# Altium PCB 1_ir-tara-f.PcbDoc (part 6 of 8)
Units mm, origin at the board's own origin, x right, y up, seen from the top; angles counter-clockwise.
Board outline 151 x 86.38 mm, 2 copper layers (Top Layer, Bottom Layer); 728 components, 20 nets, 2100 pads, 0 vias.
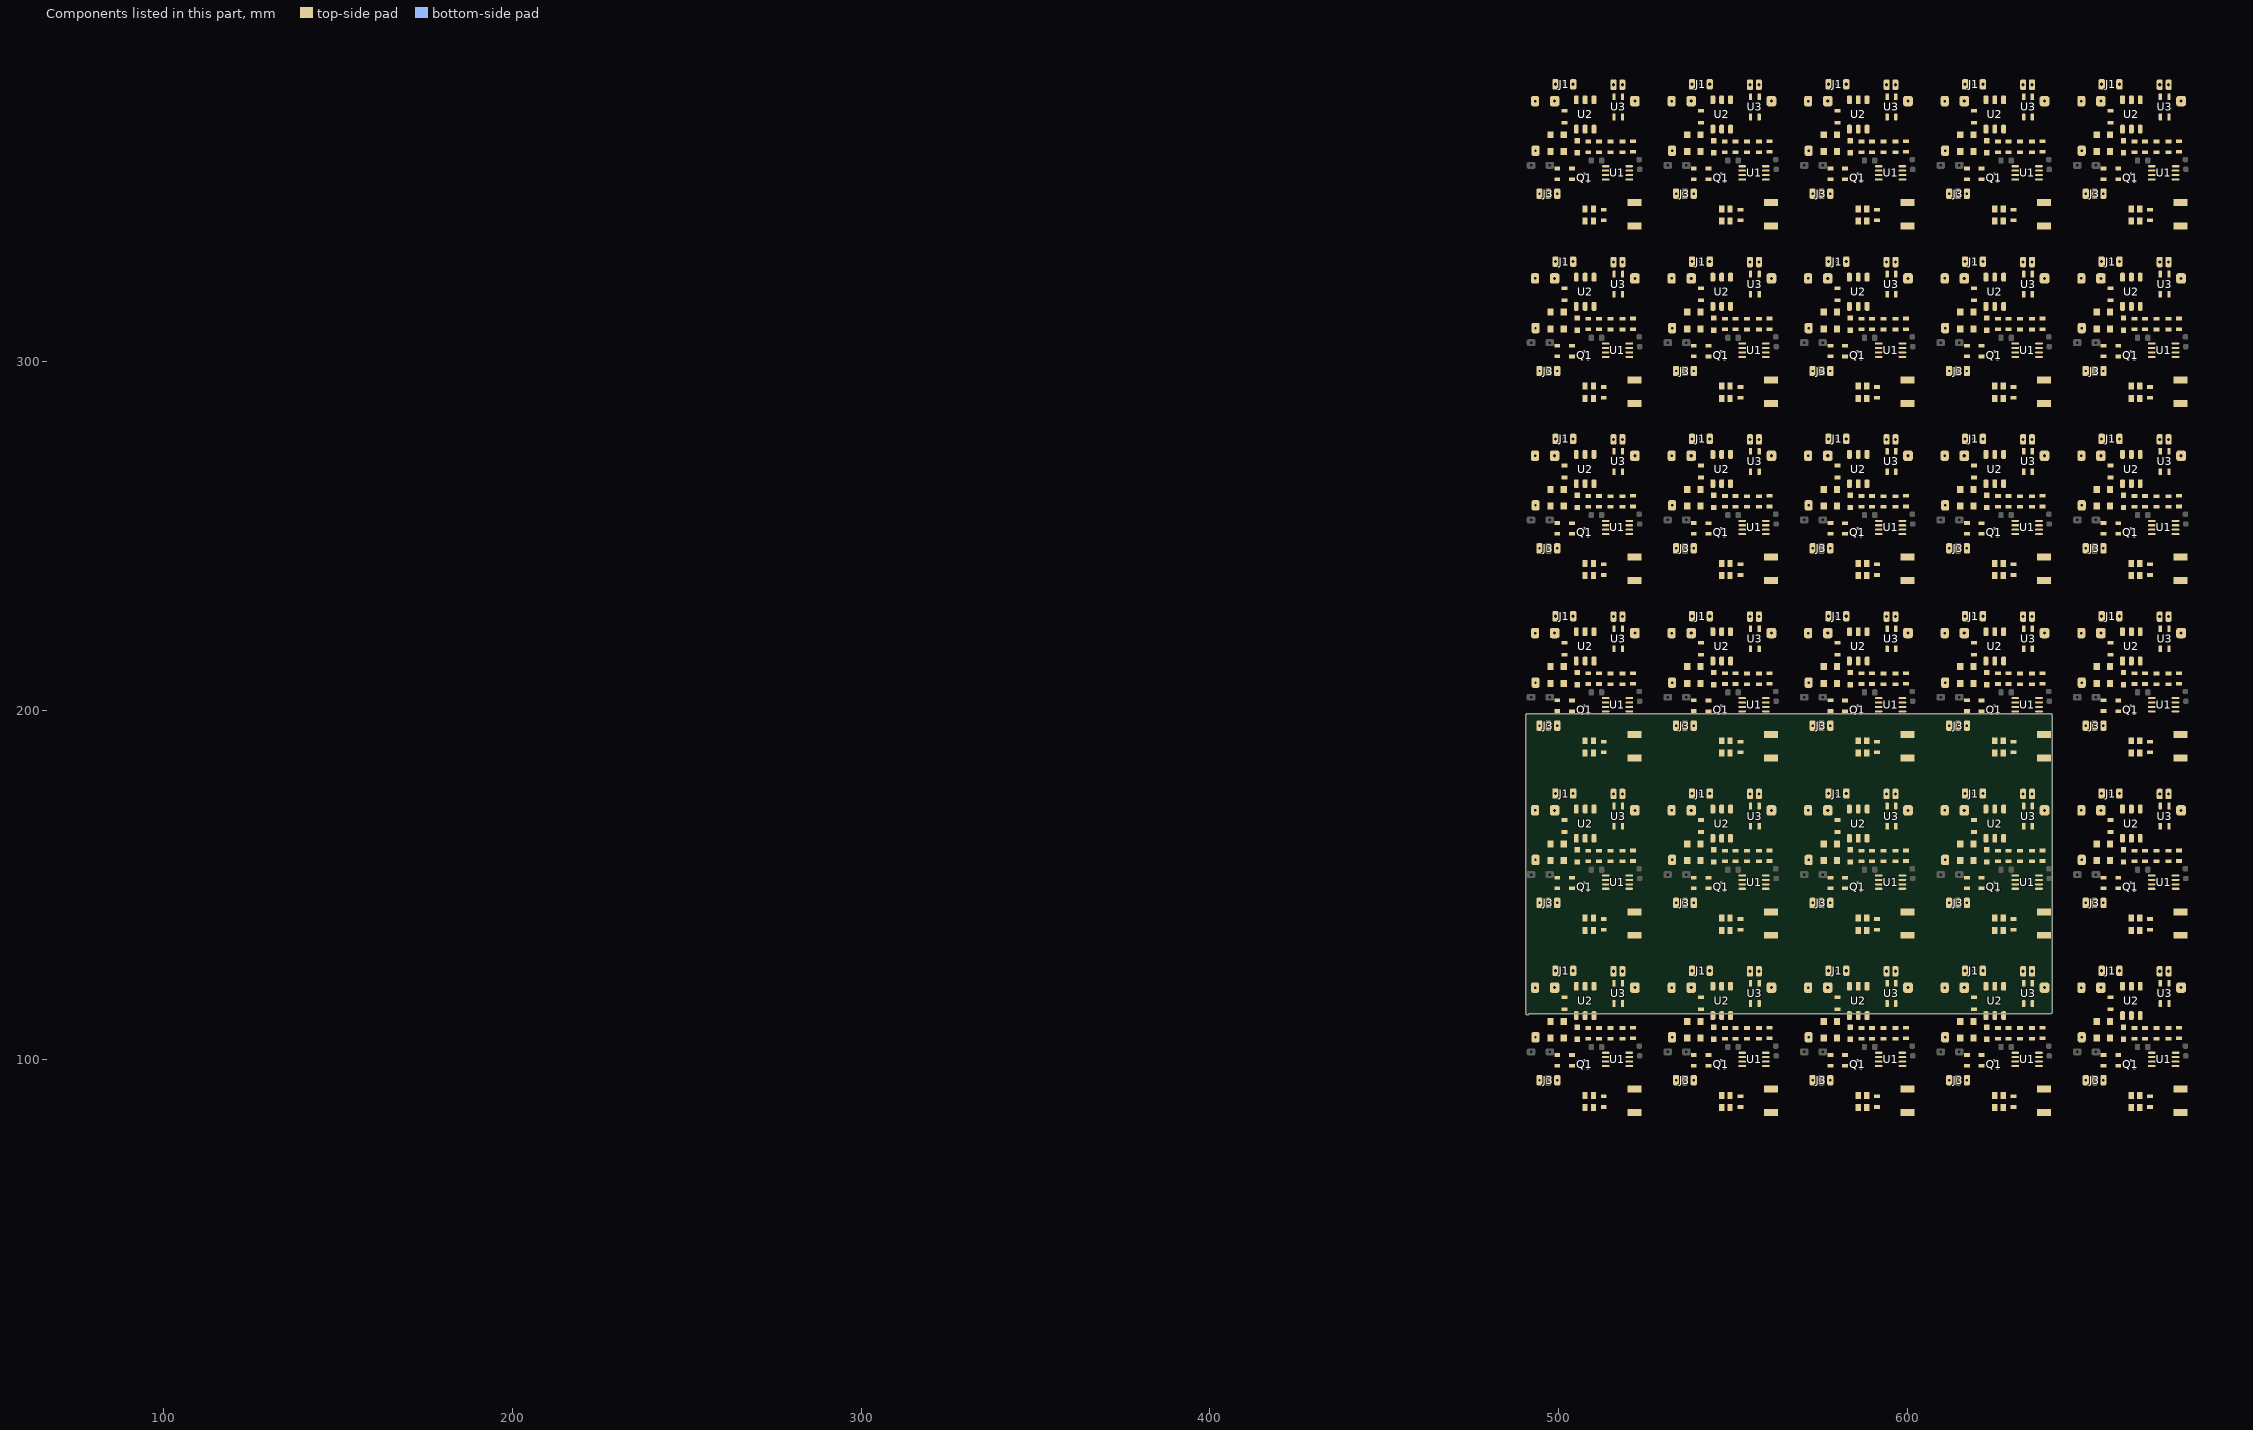
[diagram p6: the components of this part, seen from the top]

## Nets (pads, with @x,y where several pads share a name; then routed paths per layer and width w, separated by ;. In a path a pad name is that pad's centre, name@x,y a point inside that pad or via, vN(x,y) a via of type N, cw(c..) or ccw(c..) an arc to the next point about the centre after c; other vN are vias at no path point) (continued)
copper on no net: (continued)
  Top Layer w0.9: 504.286,125.16 511.017,125.16 512.922,123.255 512.922,120.969 515.081,118.81 518.383,118.81 ; 504.286,175.998 511.017,175.998 512.922,174.093 512.922,171.807 515.081,169.648 518.383,169.648 ; 504.286,226.837 511.017,226.837 512.922,224.932 512.922,222.646 515.081,220.487 518.383,220.487 ; 504.286,277.676 511.017,277.676 512.922,275.771 512.922,273.485 515.081,271.326 518.383,271.326 ; 504.286,328.514 511.017,328.514 512.922,326.609 512.922,324.323 515.081,322.164 518.383,322.164 ; 504.286,379.353 511.017,379.353 512.922,377.448 512.922,375.162 515.081,373.003 518.383,373.003 ; 515.716,125.287 515.843,125.16 515.843,122.382 515.888,122.337 515.888,121.837 ; 515.716,176.125 515.843,175.998 515.843,173.22 515.888,173.175 515.888,172.675 ; 515.716,226.964 515.843,226.837 515.843,224.059 515.888,224.014 515.888,223.514 ; 515.716,277.803 515.843,277.676 515.843,274.898 515.888,274.853 515.888,274.353 ; 515.716,328.641 515.843,328.514 515.843,325.736 515.888,325.691 515.888,325.191 ; 515.716,379.48 515.843,379.353 515.843,376.575 515.888,376.53 515.888,376.03 ; 518.129,125.287 518.333,125.083 518.333,121.842 518.338,121.837 ; 518.129,176.125 518.333,175.921 518.333,172.68 518.338,172.675 ; 518.129,226.964 518.333,226.76 518.333,223.519 518.338,223.514 ; 518.129,277.803 518.333,277.599 518.333,274.358 518.338,274.353 ; 518.129,328.641 518.333,328.437 518.333,325.196 518.338,325.191 ; 518.129,379.48 518.333,379.276 518.333,376.035 518.338,376.03 ; 518.256,108.993 518.308,108.993 518.383,109.068 518.383,112.968 518.383,115.279 518.343,115.319 518.343,116.032 518.338,116.037 518.343,116.042 518.343,116.754 518.383,116.794 518.383,118.81 ; 518.256,159.831 518.308,159.831 518.383,159.906 518.383,163.806 518.383,166.118 518.343,166.158 518.343,166.87 518.338,166.875 518.343,166.88 518.343,167.593 518.383,167.633 518.383,169.648 ; 518.256,210.67 518.308,210.67 518.383,210.745 518.383,214.645 518.383,216.957 518.343,216.997 518.343,217.709 518.338,217.714 518.343,217.719 518.343,218.431 518.383,218.471 518.383,220.487 ; 518.256,261.509 518.308,261.509 518.383,261.584 518.383,265.484 518.383,267.795 518.343,267.835 518.343,268.548 518.338,268.553 518.343,268.558 518.343,269.27 518.383,269.31 518.383,271.326 ; 518.256,312.347 518.308,312.347 518.383,312.422 518.383,316.322 518.383,318.634 518.343,318.674 518.343,319.386 518.338,319.391 518.343,319.396 518.343,320.109 518.383,320.149 518.383,322.164 ; 518.256,363.186 518.308,363.186 518.383,363.261 518.383,367.161 518.383,369.473 518.343,369.513 518.343,370.225 518.338,370.23 518.343,370.235 518.343,370.947 518.383,370.987 518.383,373.003 ; 522.272,119.778 521.271,119.778 520.896,119.402 520.896,119.337 520.369,118.81 518.383,118.81 ; 522.272,170.617 521.271,170.617 520.896,170.241 520.896,170.176 520.369,169.648 518.383,169.648 ; 522.272,221.455 521.271,221.455 520.896,221.08 520.896,221.014 520.369,220.487 518.383,220.487 ; 522.272,272.294 521.271,272.294 520.896,271.918 520.896,271.853 520.369,271.326 518.383,271.326 ; 522.272,323.132 521.271,323.132 520.896,322.757 520.896,322.691 520.369,322.164 518.383,322.164 ; 522.272,373.971 521.271,373.971 520.896,373.596 520.896,373.53 520.369,373.003 518.383,373.003 ; 543.44,125.16 550.171,125.16 552.076,123.255 552.076,120.969 554.235,118.81 557.537,118.81 ; 543.44,175.998 550.171,175.998 552.076,174.093 552.076,171.807 554.235,169.648 557.537,169.648 ; 543.44,226.837 550.171,226.837 552.076,224.932 552.076,222.646 554.235,220.487 557.537,220.487 ; 543.44,277.676 550.171,277.676 552.076,275.771 552.076,273.485 554.235,271.326 557.537,271.326 ; 543.44,328.514 550.171,328.514 552.076,326.609 552.076,324.323 554.235,322.164 557.537,322.164 ; 543.44,379.353 550.171,379.353 552.076,377.448 552.076,375.162 554.235,373.003 557.537,373.003 ; 554.87,125.287 554.997,125.16 554.997,122.382 555.042,122.337 555.042,121.837 ; 554.87,176.125 554.997,175.998 554.997,173.22 555.042,173.175 555.042,172.675 ; 554.87,226.964 554.997,226.837 554.997,224.059 555.042,224.014 555.042,223.514 ; 554.87,277.803 554.997,277.676 554.997,274.898 555.042,274.853 555.042,274.353 ; 554.87,328.641 554.997,328.514 554.997,325.736 555.042,325.691 555.042,325.191 ; 554.87,379.48 554.997,379.353 554.997,376.575 555.042,376.53 555.042,376.03 ; 557.283,125.287 557.487,125.083 557.487,121.842 557.492,121.837 ; 557.283,176.125 557.487,175.921 557.487,172.68 557.492,172.675 ; 557.283,226.964 557.487,226.76 557.487,223.519 557.492,223.514 ; 557.283,277.803 557.487,277.599 557.487,274.358 557.492,274.353 ; 557.283,328.641 557.487,328.437 557.487,325.196 557.492,325.191 ; 557.283,379.48 557.487,379.276 557.487,376.035 557.492,376.03 ; 557.41,108.993 557.462,108.993 557.537,109.068 557.537,112.968 557.537,115.279 557.497,115.319 557.497,116.032 557.492,116.037 557.497,116.042 557.497,116.754 557.537,116.794 557.537,118.81 ; 557.41,159.831 557.462,159.831 557.537,159.906 557.537,163.806 557.537,166.118 557.497,166.158 557.497,166.87 557.492,166.875 557.497,166.88 557.497,167.593 557.537,167.633 557.537,169.648 ; 557.41,210.67 557.462,210.67 557.537,210.745 557.537,214.645 557.537,216.957 557.497,216.997 557.497,217.709 557.492,217.714 557.497,217.719 557.497,218.431 557.537,218.471 557.537,220.487 ; 557.41,261.509 557.462,261.509 557.537,261.584 557.537,265.484 557.537,267.795 557.497,267.835 557.497,268.548 557.492,268.553 557.497,268.558 557.497,269.27 557.537,269.31 557.537,271.326 ; 557.41,312.347 557.462,312.347 557.537,312.422 557.537,316.322 557.537,318.634 557.497,318.674 557.497,319.386 557.492,319.391 557.497,319.396 557.497,320.109 557.537,320.149 557.537,322.164 ; 557.41,363.186 557.462,363.186 557.537,363.261 557.537,367.161 557.537,369.473 557.497,369.513 557.497,370.225 557.492,370.23 557.497,370.235 557.497,370.947 557.537,370.987 557.537,373.003 ; 561.427,119.778 560.426,119.778 560.05,119.402 560.05,119.337 559.523,118.81 557.537,118.81 ; 561.427,170.617 560.426,170.617 560.05,170.241 560.05,170.176 559.523,169.648 557.537,169.648 ; 561.427,221.455 560.426,221.455 560.05,221.08 560.05,221.014 559.523,220.487 557.537,220.487 ; 561.427,272.294 560.426,272.294 560.05,271.918 560.05,271.853 559.523,271.326 557.537,271.326 ; 561.427,323.132 560.426,323.132 560.05,322.757 560.05,322.691 559.523,322.164 557.537,322.164 ; 561.427,373.971 560.426,373.971 560.05,373.596 560.05,373.53 559.523,373.003 557.537,373.003 ; 582.595,125.16 589.326,125.16 591.231,123.255 591.231,120.969 593.39,118.81 596.692,118.81 ; 582.595,226.837 589.326,226.837 591.231,224.932 591.231,222.646 593.39,220.487 596.692,220.487 ; 582.595,277.676 589.326,277.676 591.231,275.771 591.231,273.485 593.39,271.326 596.692,271.326 ; 582.595,328.514 589.326,328.514 591.231,326.609 591.231,324.323 593.39,322.164 596.692,322.164 ; 582.595,379.353 589.326,379.353 591.231,377.448 591.231,375.162 593.39,373.003 596.692,373.003 ; 594.025,125.287 594.152,125.16 594.152,122.382 594.197,122.337 594.197,121.837 ; 594.025,226.964 594.152,226.837 594.152,224.059 594.197,224.014 594.197,223.514 ; 594.025,277.803 594.152,277.676 594.152,274.898 594.197,274.853 594.197,274.353 ; 594.025,328.641 594.152,328.514 594.152,325.736 594.197,325.691 594.197,325.191 ; 594.025,379.48 594.152,379.353 594.152,376.575 594.197,376.53 594.197,376.03 ; 596.438,125.287 596.642,125.083 596.642,121.842 596.647,121.837 ; 596.438,226.964 596.642,226.76 596.642,223.519 596.647,223.514 ; 596.438,277.803 596.642,277.599 596.642,274.358 596.647,274.353 ; 596.438,328.641 596.642,328.437 596.642,325.196 596.647,325.191 ; 596.438,379.48 596.642,379.276 596.642,376.035 596.647,376.03 ; 596.565,108.993 596.617,108.993 596.692,109.068 596.692,112.968 596.692,115.279 596.652,115.319 596.652,116.032 596.647,116.037 596.652,116.042 596.652,116.754 596.692,116.794 596.692,118.81 ; 596.565,210.67 596.617,210.67 596.692,210.745 596.692,214.645 596.692,216.957 596.652,216.997 596.652,217.709 596.647,217.714 596.652,217.719 596.652,218.431 596.692,218.471 596.692,220.487 ; 596.565,261.509 596.617,261.509 596.692,261.584 596.692,265.484 596.692,267.795 596.652,267.835 596.652,268.548 596.647,268.553 596.652,268.558 596.652,269.27 596.692,269.31 596.692,271.326 ; 596.565,312.347 596.617,312.347 596.692,312.422 596.692,316.322 596.692,318.634 596.652,318.674 596.652,319.386 596.647,319.391 596.652,319.396 596.652,320.109 596.692,320.149 596.692,322.164 ; 596.565,363.186 596.617,363.186 596.692,363.261 596.692,367.161 596.692,369.473 596.652,369.513 596.652,370.225 596.647,370.23 596.652,370.235 596.652,370.947 596.692,370.987 596.692,373.003 ; 600.581,119.778 599.581,119.778 599.205,119.402 599.205,119.337 598.678,118.81 596.692,118.81 ; 600.581,221.455 599.581,221.455 599.205,221.08 599.205,221.014 598.678,220.487 596.692,220.487 ; 600.581,272.294 599.58,272.294 599.205,271.918 599.205,271.853 598.678,271.326 596.692,271.326 ; 600.581,323.132 599.58,323.132 599.205,322.757 599.205,322.691 598.678,322.164 596.692,322.164 ; 600.581,373.971 599.58,373.971 599.205,373.596 599.205,373.53 598.678,373.003 596.692,373.003 ; 621.75,125.16 628.481,125.16 630.386,123.255 630.386,120.969 632.545,118.81 635.847,118.81 ; 621.75,175.998 628.481,175.998 630.386,174.093 630.386,171.807 632.545,169.648 635.847,169.648 ; 621.75,226.837 628.481,226.837 630.386,224.932 630.386,222.646 632.545,220.487 635.847,220.487 ; 621.75,277.676 628.481,277.676 630.386,275.771 630.386,273.485 632.545,271.326 635.847,271.326 ; 621.75,328.514 628.481,328.514 630.386,326.609 630.386,324.323 632.545,322.164 635.847,322.164 ; 621.75,379.353 628.481,379.353 630.386,377.448 630.386,375.162 632.545,373.003 635.847,373.003 ; 633.18,125.287 633.307,125.16 633.307,122.382 633.352,122.337 633.352,121.837 ; 633.18,176.125 633.307,175.998 633.307,173.22 633.352,173.175 633.352,172.675 ; 633.18,226.964 633.307,226.837 633.307,224.059 633.352,224.014 633.352,223.514 ; 633.18,277.803 633.307,277.676 633.307,274.898 633.352,274.853 633.352,274.353 ; 633.18,328.641 633.307,328.514 633.307,325.736 633.352,325.691 633.352,325.191 ; 633.18,379.48 633.307,379.353 633.307,376.575 633.352,376.53 633.352,376.03 ; 635.593,125.287 635.797,125.083 635.797,121.842 635.802,121.837 ; 635.593,176.125 635.797,175.921 635.797,172.68 635.802,172.675 ; 635.593,226.964 635.797,226.76 635.797,223.519 635.802,223.514 ; 635.593,277.803 635.797,277.599 635.797,274.358 635.802,274.353 ; 635.593,328.641 635.797,328.437 635.797,325.196 635.802,325.191 ; 635.593,379.48 635.797,379.276 635.797,376.035 635.802,376.03 ; 635.72,108.993 635.772,108.993 635.847,109.068 635.847,112.968 635.847,115.279 635.807,115.319 635.807,116.032 635.802,116.037 635.807,116.042 635.807,116.754 635.847,116.794 635.847,118.81 ; 635.72,159.831 635.772,159.831 635.847,159.906 635.847,163.806 635.847,166.118 635.807,166.158 635.807,166.87 635.802,166.875 635.807,166.88 635.807,167.593 635.847,167.633 635.847,169.648 ; 635.72,210.67 635.772,210.67 635.847,210.745 635.847,214.645 635.847,216.957 635.807,216.997 635.807,217.709 635.802,217.714 635.807,217.719 635.807,218.431 635.847,218.471 635.847,220.487 ; 635.72,261.509 635.772,261.509 635.847,261.584 635.847,265.484 635.847,267.795 635.807,267.835 635.807,268.548 635.802,268.553 635.807,268.558 635.807,269.27 635.847,269.31 635.847,271.326 ; 635.72,312.347 635.772,312.347 635.847,312.422 635.847,316.322 635.847,318.634 635.807,318.674 635.807,319.386 635.802,319.391 635.807,319.396 635.807,320.109 635.847,320.149 635.847,322.164 ; 635.72,363.186 635.772,363.186 635.847,363.261 635.847,367.161 635.847,369.473 635.807,369.513 635.807,370.225 635.802,370.23 635.807,370.235 635.807,370.947 635.847,370.987 635.847,373.003 ; 639.736,119.778 638.735,119.778 638.36,119.402 638.36,119.337 637.833,118.81 635.847,118.81 ; 639.736,170.617 638.735,170.617 638.36,170.241 638.36,170.176 637.833,169.648 635.847,169.648 ; 639.736,221.455 638.735,221.455 638.36,221.08 638.36,221.014 637.832,220.487 635.847,220.487 ; 639.736,272.294 638.735,272.294 638.36,271.918 638.36,271.853 637.832,271.326 635.847,271.326 ; 639.736,323.132 638.735,323.132 638.36,322.757 638.36,322.691 637.832,322.164 635.847,322.164 ; 639.736,373.971 638.735,373.971 638.36,373.596 638.36,373.53 637.832,373.003 635.847,373.003 ; 660.904,125.16 667.635,125.16 669.54,123.255 669.54,120.969 671.699,118.81 675.001,118.81 ; 660.904,175.998 667.635,175.998 669.54,174.093 669.54,171.807 671.699,169.648 675.001,169.648 ; 660.904,226.837 667.635,226.837 669.54,224.932 669.54,222.646 671.699,220.487 675.001,220.487 ; 660.904,277.676 667.635,277.676 669.54,275.771 669.54,273.485 671.699,271.326 675.001,271.326 ; 660.904,328.514 667.635,328.514 669.54,326.609 669.54,324.323 671.699,322.164 675.001,322.164 ; 660.904,379.353 667.635,379.353 669.54,377.448 669.54,375.162 671.699,373.003 675.001,373.003 ; 672.334,125.287 672.461,125.16 672.461,122.382 672.506,122.337 672.506,121.837 ; 672.334,176.125 672.461,175.998 672.461,173.22 672.506,173.175 672.506,172.675 ; 672.334,226.964 672.461,226.837 672.461,224.059 672.506,224.014 672.506,223.514 ; 672.334,277.803 672.461,277.676 672.461,274.898 672.506,274.853 672.506,274.353 ; 672.334,328.641 672.461,328.514 672.461,325.736 672.506,325.691 672.506,325.191 ; 672.334,379.48 672.461,379.353 672.461,376.575 672.506,376.53 672.506,376.03 ; 674.747,125.287 674.951,125.083 674.951,121.842 674.956,121.837 ; 674.747,176.125 674.951,175.921 674.951,172.68 674.956,172.675 ; 674.747,226.964 674.951,226.76 674.951,223.519 674.956,223.514 ; 674.747,277.803 674.951,277.599 674.951,274.358 674.956,274.353 ; 674.747,328.641 674.951,328.437 674.951,325.196 674.956,325.191 ; 674.747,379.48 674.951,379.276 674.951,376.035 674.956,376.03 ; 674.874,108.993 674.926,108.993 675.001,109.068 675.001,112.968 675.001,115.279 674.961,115.319 674.961,116.032 674.956,116.037 674.961,116.042 674.961,116.754 675.001,116.794 675.001,118.81 ; 674.874,159.831 674.926,159.831 675.001,159.906 675.001,163.806 675.001,166.118 674.961,166.158 674.961,166.87 674.956,166.875 674.961,166.88 674.961,167.593 675.001,167.633 675.001,169.648 ; 674.874,210.67 674.926,210.67 675.001,210.745 675.001,214.645 675.001,216.957 674.961,216.997 674.961,217.709 674.956,217.714 674.961,217.719 674.961,218.431 675.001,218.471 675.001,220.487 ; 674.874,261.509 674.926,261.509 675.001,261.584 675.001,265.484 675.001,267.795 674.961,267.835 674.961,268.548 674.956,268.553 674.961,268.558 674.961,269.27 675.001,269.31 675.001,271.326 ; 674.874,312.347 674.926,312.347 675.001,312.422 675.001,316.322 675.001,318.634 674.961,318.674 674.961,319.386 674.956,319.391 674.961,319.396 674.961,320.109 675.001,320.149 675.001,322.164 ; 674.874,363.186 674.926,363.186 675.001,363.261 675.001,367.161 675.001,369.473 674.961,369.513 674.961,370.225 674.956,370.23 674.961,370.235 674.961,370.947 675.001,370.987 675.001,373.003 ; 678.89,119.778 677.89,119.778 677.514,119.402 677.514,119.337 676.987,118.81 675.001,118.81 ; 678.89,170.617 677.89,170.617 677.514,170.241 677.514,170.176 676.987,169.648 675.001,169.648 ; 678.89,221.455 677.89,221.455 677.514,221.08 677.514,221.014 676.987,220.487 675.001,220.487 ; 678.89,272.294 677.89,272.294 677.514,271.918 677.514,271.853 676.987,271.326 675.001,271.326 ; 678.89,323.132 677.89,323.132 677.514,322.757 677.514,322.691 676.987,322.164 675.001,322.164 ; 678.89,373.971 677.89,373.971 677.514,373.596 677.514,373.53 676.987,373.003 675.001,373.003